# Altium PCB stm32f107rct7_devbrd_old.PcbDoc
Units mm, origin at the board's own origin, x right, y up, seen from the top; angles counter-clockwise.
Board outline 80 x 40 mm, 2 copper layers (Top Layer, Bottom Layer); 37 components, 65 nets, 219 pads, 32 vias.
Unrouted connection lines stored in the file: 14.
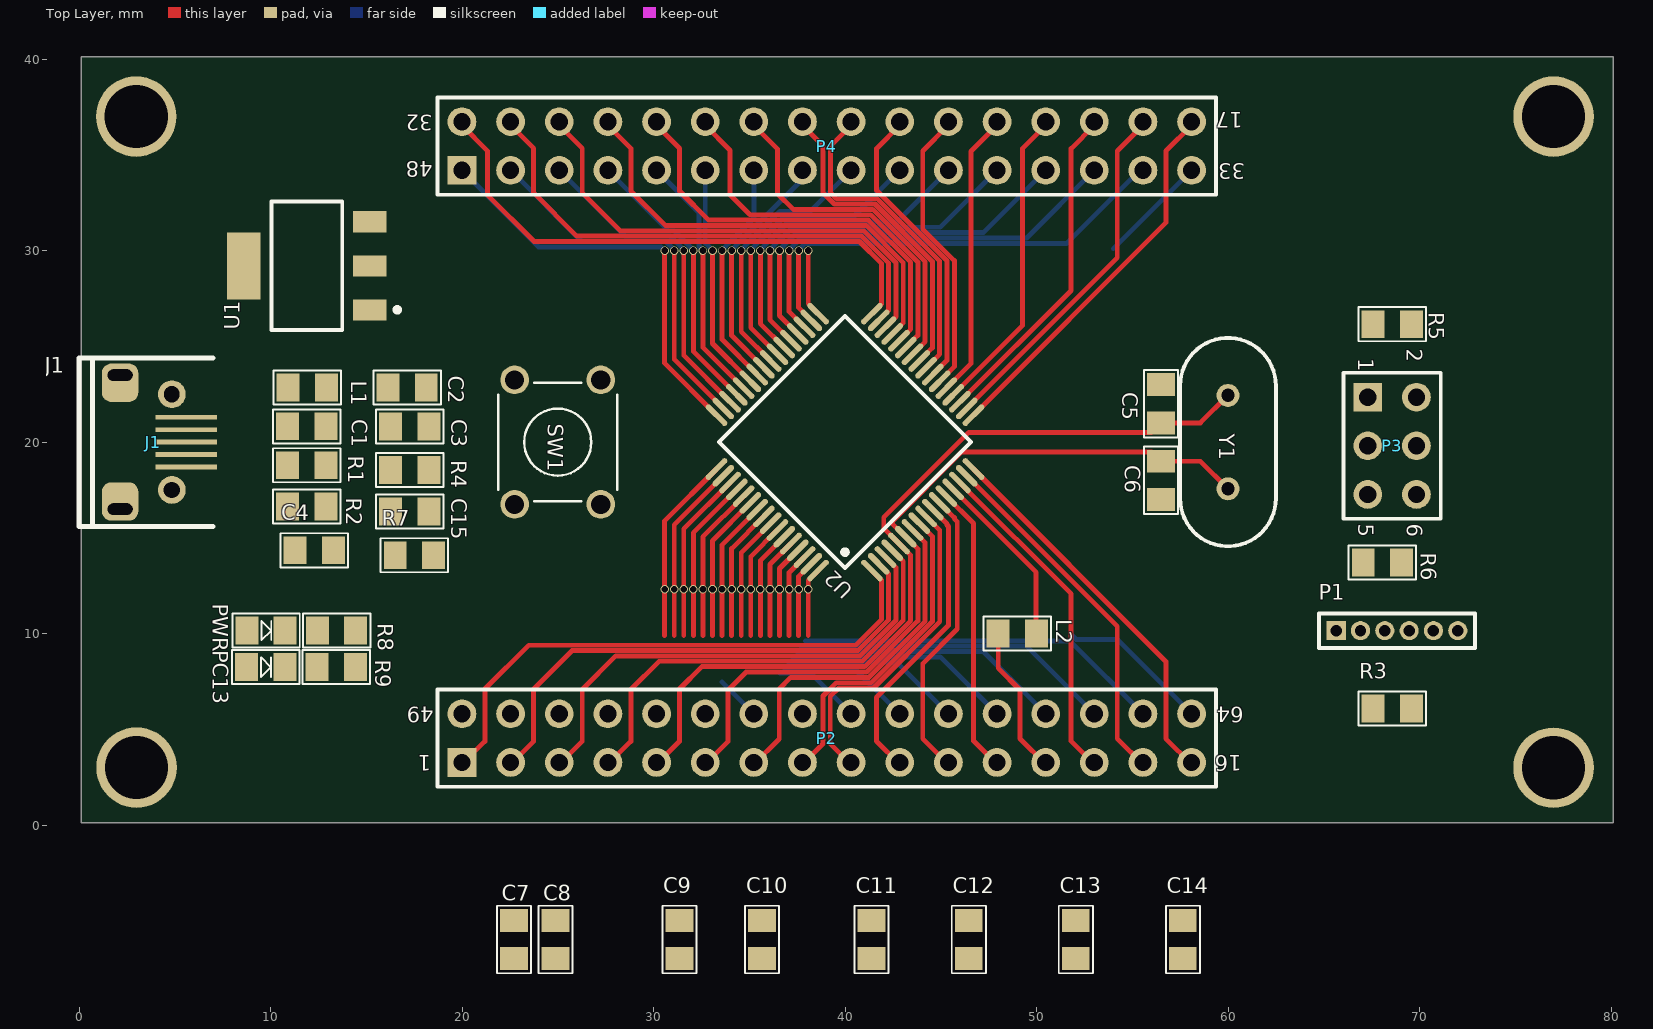
[diagram p0: Top Layer view]
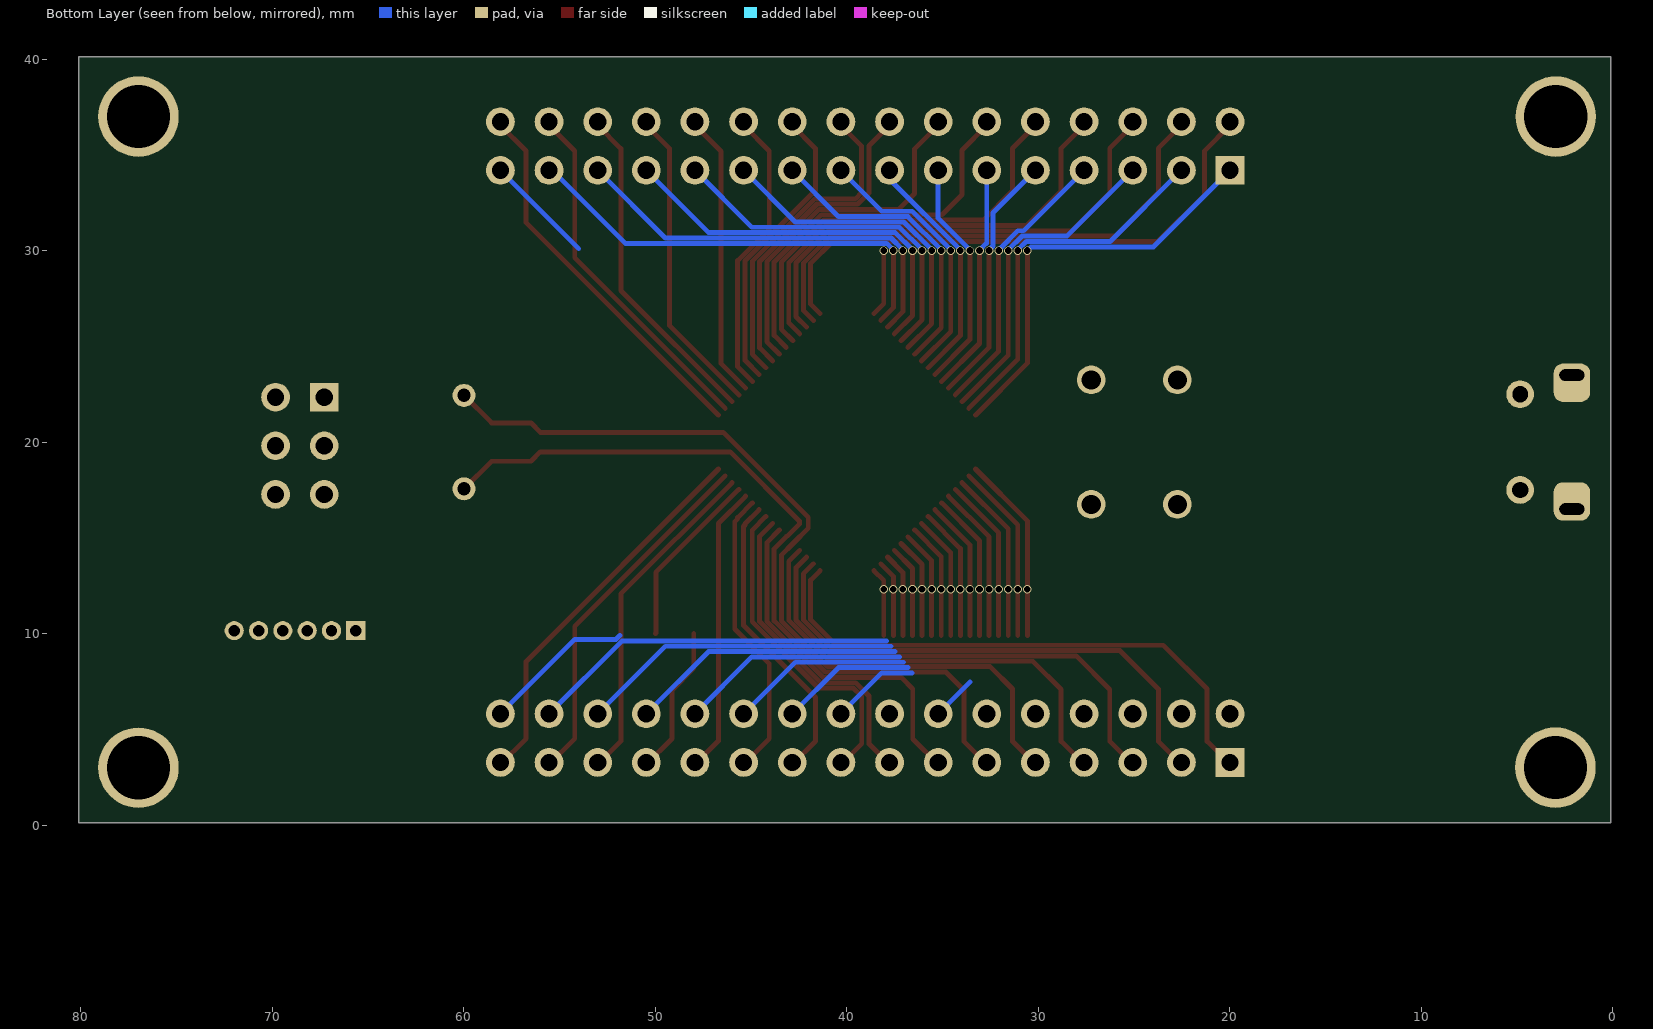
[diagram p1: Bottom Layer view, seen from below]

## Layer stack, top to bottom
Top Solder: solder mask 0.0102, Solder Resist, Dk 3.5
Top Layer: signal copper 0.0356
Dielectric 1: dielectric 0.32, FR-4, Dk 4.8
Bottom Layer: signal copper 0.0356
Bottom Solder: solder mask 0.0102, Solder Resist, Dk 3.5

## Board outline
0.11,0.118 80.11,0.118 80.11,40.118 0.11,40.118

## Design rules (kind name [scope] priority, off if disabled: settings)
Clearance [All] p1: gap=0.203 ignorepadtopadclearanceinfootprint=TRUE
HoleSize [All] p1: absolutevalues=TRUE maxlimit=5.08 minlimit=0.254 maxpercent=80.000 minpercent=20.000
MinimumSolderMaskSliver [All] p1: minsoldermaskwidth=0.025
PolygonConnect [All] p1: connectstyle=Relief reliefconductorwidth=0.254 reliefentries=4 polygonreliefangle="90 Angle" airgapwidth=0.254
RoutingVias [All] p1: holewidth=0.35 width=0.45 viastyle="Through Hole" minholewidth=0.35 minwidth=0.45 maxholewidth=1.016 maxwidth=1.27
SilkToSilkClearance [All] p1: silktosilkclearance=0.025
SilkToSolderMaskClearance [IsPad] p1: minsilkscreentomaskgap=0 clearancetoexposedcopper=TRUE
SolderMaskExpansion [All] p1: expansion=0.102
Width [All] p1: maxlimit=5.08 minlimit=0.254 preferedwidth=0.254
26 further rules are at their usual default settings.

## Classes and differential pairs
component class stm32f107rct7_devbrd: C7 C8 C9 C10 C11 C12 C13 C14

## Components (designator, comment, footprint, x,y, rotation, side; value= is the part's Value field where it differs from the comment)
C1 "10nF" SMD0805_CAP 11.889,20.819 r270 top
C2 "10nF" SMD0805_CAP 17.128,22.846 r270 top value=10uF
C3 "10nF" SMD0805_CAP 17.271,20.809 r270 top value=10uF
C4 "100nF" SMD0805_CAP 12.286,14.347 r90 top
C5 "22pF" SMD0805_CAP 56.493,21.996 r0 top
C6 "22pF" SMD0805_CAP 56.493,17.996 r180 top
C7 "100nF" SMD0805_CAP 22.709,-5.978 r0 top
C8 "4.7uF" SMD0805_CAP 24.875,-5.978 r0 top
C9 "100nF" SMD0805_CAP 31.345,-5.978 r0 top
C10 "4.7uF" SMD0805_CAP 35.663,-5.978 r0 top
C11 "100nF" SMD0805_CAP 41.378,-5.978 r0 top
C12 "4.7uF" SMD0805_CAP 46.458,-5.978 r0 top
C13 "100nF" SMD0805_CAP 52.046,-5.978 r0 top
C14 "4.7uF" SMD0805_CAP 57.634,-5.978 r0 top
C15 "100nF" SMD0805_CAP 17.271,16.374 r270 top
J1 "MicroUSB_B" micro_usb_molex_105017-0001 -0.007,19.996 r0 top
L1 "Bead" SMD0805 11.921,22.851 r270 top
L2 "Bead" SMD0805 48.993,9.996 r270 top value=10mH
P1 "ISP" ISP 64.742,9.251 r0 top
P2 "Header 16X2A" HDR2X16_CEN 19.993,3.266 r0 top
P3 "Header 3X2" HDR2X3 67.293,22.343 r270 top
P4 "Header 16X2A" HDR2X16_CEN 19.993,34.186 r0 top
PC13 "LED0" LED 9.746,8.246 r0 top (schematic designator PC1)
PWR "LED0" LED 9.762,10.156 r0 top (schematic designator PWR1)
R1 "22R" SMD0805 11.889,18.787 r270 top
R2 "22R" SMD0805 11.889,16.637 r270 top
R3 "22R" SMD0805 68.563,6.087 r270 top
R4 "1K" SMD0805 17.271,18.533 r90 top
R5 "100K" SMD0805 68.563,26.153 r270 top
R6 "100K" SMD0805 68.055,13.707 r90 top
R7 "100K" SMD0805 17.509,14.088 r270 top value=10k
R8 "1K" SMD0805 13.445,10.156 r90 top
R9 "1K" SMD0805 13.429,8.246 r90 top
SW1 "Switch" 430156050726 24.993,19.996 r90 top
U1 "NCP1117" SOT-223-2 11.889,29.201 r90 top
U2 "STM32F107RCT7" QFP50P1200X1200X160-64N 39.993,19.996 r135 top
Y1 "8MHz" XTAL 59.993,19.996 r270 top

## Footprints (in the part's own frame and the unit in brackets; to place one, negate y for a bottom-side part, rotate by r counter-clockwise, add the part's x,y. Pads: shape width x height; smd on the part's side, far side on the other; paste and mask are expansions set on the pad)
430156050726 [mm] "6*6mm vertical type, THT, height 5.0mm, white actuator, 260gf, Bulk"
  round 1.5 hole 1: 1(-3.25,2.25) 2(-3.25,-2.25) 3(3.25,2.25) 4(3.25,-2.25)
  silkscreen extent -3.1,-3.1 3.1,3.1, body extent -3.95,-3.1 3.95,3.1, height 5
HDR2X3 [mm] "Connector; Header; 3x2 Position"
  rect 1.5x1.5 hole 0.9: 1(0,0)
  round 1.5 hole 0.9: 2(0,2.54) 3(2.54,0) 4(2.54,2.54) 5(5.08,0) 6(5.08,2.54)
  silkscreen extent -1.27,-1.27 6.35,3.81
HDR2X16_CEN [mm] "Connector; Header; 16x2 Position"
  rect 1.5x1.5 hole 0.9: 1(0,0)
  round 1.5 hole 0.9: 2(2.54,0) 3(5.08,0) 4(7.62,0) 5(10.16,0) 6(12.7,0) 7(15.24,0) 8(17.78,0) 9(20.32,0) 10(22.86,0) 11(25.4,0) 12(27.94,0) 13(30.48,0) 14(33.02,0) 15(35.56,0) 16(38.1,0) 17(0,2.54) 18(2.54,2.54) 19(5.08,2.54) 20(7.62,2.54) 21(10.16,2.54) 22(12.7,2.54) 23(15.24,2.54) 24(17.78,2.54) 25(20.32,2.54) 26(22.86,2.54) 27(25.4,2.54) 28(27.94,2.54) 29(30.48,2.54) 30(33.02,2.54) 31(35.56,2.54) 32(38.1,2.54)
  silkscreen extent -1.27,-1.27 39.37,3.81
ISP [mm]
  rect 1x1 hole 0.6: 1(0.9,0.9)
  round 1 hole 0.6: 2(2.17,0.9) 3(3.44,0.9) 4(4.71,0.9) 5(5.98,0.9) 6(7.25,0.9)
  silkscreen extent 0,0 8.15,1.8
LED [mm]
  rect 1.2x1.45 smd: 1(-1,0) 2(1,0)
  silkscreen extent -1.76,-0.89 1.76,0.89, body extent -2.54,-0.63 1.01,0.62, height 1.1
micro_usb_molex_105017-0001 [mm]
  rect 3.2x0.25 smd: 1(5.6,1.3) 2(5.6,0.65) 3(5.6,0) 4(5.6,-0.65) 5(5.6,-1.3)
  rrect50% 1.9x2 hole 0.6 slot 1.3 at 0 deg copper offset 0,0.4: 5(2.15,-3.5)
  rrect50% 1.9x2 hole 0.6 slot 1.3 at 0 deg copper offset 0,-0.4: 5(2.15,3.5)
  round 1.45 hole 0.85: 5(4.85,-2.5)
  round 1.45 hole 0.85 slot 0.8 at 0 deg: 5(4.85,2.5)
  silkscreen extent 0,-4.4 7,4.4, body extent -0.45,-4.1 4.95,4.1, height 2.78
QFP50P1200X1200X160-64N [mm]
  oval 1.475x0.3 smd: 1(-5.738,3.75) 2(-5.738,3.25) 3(-5.738,2.75) 4(-5.738,2.25) 5(-5.738,1.75) 6(-5.738,1.25) 7(-5.738,0.75) 8(-5.738,0.25) 9(-5.738,-0.25) 10(-5.738,-0.75) 11(-5.738,-1.25) 12(-5.738,-1.75) 13(-5.738,-2.25) 14(-5.738,-2.75) 15(-5.738,-3.25) 16(-5.738,-3.75) 33(5.738,-3.75) 34(5.738,-3.25) 35(5.738,-2.75) 36(5.738,-2.25) 37(5.738,-1.75) 38(5.738,-1.25) 39(5.738,-0.75) 40(5.738,-0.25) 41(5.738,0.25) 42(5.738,0.75) 43(5.738,1.25) 44(5.738,1.75) 45(5.738,2.25) 46(5.738,2.75) 47(5.738,3.25) 48(5.738,3.75)
  oval 0.3x1.475 smd: 17(-3.75,-5.738) 18(-3.25,-5.738) 19(-2.75,-5.738) 20(-2.25,-5.738) 21(-1.75,-5.738) 22(-1.25,-5.738) 23(-0.75,-5.738) 24(-0.25,-5.738) 25(0.25,-5.738) 26(0.75,-5.738) 27(1.25,-5.738) 28(1.75,-5.738) 29(2.25,-5.738) 30(2.75,-5.738) 31(3.25,-5.738) 32(3.75,-5.738) 49(3.75,5.738) 50(3.25,5.738) 51(2.75,5.738) 52(2.25,5.738) 53(1.75,5.738) 54(1.25,5.738) 55(0.75,5.738) 56(0.25,5.738) 57(-0.25,5.738) 58(-0.75,5.738) 59(-1.25,5.738) 60(-1.75,5.738) 61(-2.25,5.738) 62(-2.75,5.738) 63(-3.25,5.738) 64(-3.75,5.738)
  silkscreen extent -4.65,-4.65 4.65,4.65, body extent -6,-6 6,6, height 1.6
SMD0805 [mm]
  rect 1.45x1.2 smd: 1(0,-1) 2(0,1)
  silkscreen extent -0.89,-1.76 0.89,1.76, body extent -0.62,-1 0.63,1, height 0.5
SMD0805_CAP [mm]
  rect 1.45x1.2 smd: 1(0,-1) 2(0,1)
  silkscreen extent -0.89,-1.76 0.89,1.76, body extent -0.61,-1 0.64,1, height 0.8
SOT-223-2 [mm] "SOT-223/SC-73; 4 Leads; Body 6.7 x 7.3 mm, inc. leads (LxW max)"
  rect 1.1x1.75 smd: 1(-2.3,-3.3) 2(0,-3.3) 3(2.3,-3.3)
  rect 3.5x1.75 smd: 4(0,3.3)
  silkscreen extent -3.35,-4.85 3.35,1.85, body extent -3.35,-3.7 3.35,3.5, height 1.85
XTAL [mm]
  round 1.2 hole 0.7: 1(-2.44,0) 2(2.44,0)
  silkscreen extent -5.44,-2.5 5.44,2.5

## Part data
C1 C2 C3 C5 C6 C7 C8 C9 C10 C11 C12 C13 C14 C15: library part "Cap Semi", "Capacitor (Semiconductor SIM Model)", LatestRevisionDate=29-May-2009, LatestRevisionNote="IPC-7351 Footprint Added.", PackageDescription="Chip Capacitor", PackageReference=C1206, Published=8-Jun-2000, Publisher="Altium Limited"
C4: library part Cap, "Capacitor (Semiconductor SIM Model)"
L1 L2: library part Inductor, "Inductor", Code_IEC=1005, Code_JEITA=0402, LatestRevisionDate=29-May-2009, LatestRevisionNote="IPC-7351 Footprint Added.", PackageDescription="Chip Inductor", PackageReference=0402-A, Published=8-Jun-2000, Publisher="Altium Limited"
P1: library part MHDR1X6, "Header, 6-Pin", LatestRevisionDate=17-Jul-2002, LatestRevisionNote="Re-released for DXP Platform.", Publisher="Altium Limited"
P2 P4: "Header, 16-Pin, Dual row", LatestRevisionDate=17-Jul-2002, LatestRevisionNote="Re-released for DXP Platform.", Publisher="Altium Limited"
P3: "Header, 3-Pin, Dual row", LatestRevisionDate=17-Jul-2002, LatestRevisionNote="Re-released for DXP Platform.", Publisher="Altium Limited"
PC13 PWR: "Typical INFRARED GaAs LED", LatestRevisionDate=08-Jul-2005, LatestRevisionNote="Mech Layer 1 removed.", PackageDescription="LED; 2 Leads", PackageReference=LED-0, Published=8-Jun-2000, Publisher="Altium Limited"
R1 R2 R3 R4 R5 R6 R8 R9: library part "Res Semi", "Semiconductor Resistor", LatestRevisionDate=17-Jul-2002, LatestRevisionNote="Re-released for DXP Platform.", PackageDescription="Axial Device, Thru-Hole; 2 Leads; 0.5 in Pin Spacing", PackageReference=AXIAL-0.5, Published=8-Jun-2000, Publisher="Altium Limited"
R7: library part Res, "Semiconductor Resistor"
SW1: library part 430156050726, "WS-TATV THT Tact Switch 6X6 mm", ComponentLink1Description="Manufacturer URL", ComponentLink1URL=http://www.we-online.com, ComponentLink2Description=Datasheet, ComponentLink2URL=http://katalog.we-online.de/em/datasheet/4301x6.pdf, NoPins=04, PackageReference=430156050726, PartNumber=430156050726
U1: "IC REG 5V 1A DPAC"
U2: "Integrated Circuit", Manufacturer_Name=STMicroelectronics, Mouser2 Part Number=511-STM32F107RCT7, Datasheet Link=https://componentsearchengine.com//STM32F107RCT7.pdf, Height=1.6mm, Manufacturer_Part_Number=STM32F107RCT7, Mouser2 Price/Stock=https://www.mouser.com/Search/Refine.aspx?Keyword=511-STM32F107RCT7
Y1: library part XTAL, "Crystal Oscillator 8MHz", LatestRevisionDate=17-Jul-2002, LatestRevisionNote="Re-released for DXP Platform.", PackageDescription="Crystal, Thru-Hole; 2 Leads; Body 3.1 x 8.2 mm (Dia.xH)", PackageReference=R38, Published=8-Jun-2000, Publisher="Altium Limited"

## Free pads (board coordinates)
  round 4.2 hole 3.3: ""(2.982,36.995) ""(3,3) ""(76.993,2.996) ""(76.993,36.996)

## Via types
v1: diameter 0.45, hole 0.35, Top Layer to Bottom Layer, tented both sides, 32 vias

## Nets (pads, with @x,y where several pads share a name; then routed paths per layer and width w, separated by ;. In a path a pad name is that pad's centre, name@x,y a point inside that pad or via, vN(x,y) a via of type N, cw(c..) or ccw(c..) an arc to the next point about the centre after c; other vN are vias at no path point)
BOOT0: 
BOOT1: 
GND: C7.1 C8.1 C9.1 C10.1 C11.1 C12.1 C13.1 C14.1
NetJ1_2: 
NetJ1_3: 
NetP1_4: 
NetP3_3: 
NetP3_4: 
NetPC1_2: 
NetPWR1_2: 
nRST: 
OSCIN: 
OSCOUT: 
PA0: 
PA1: 
PA2: 
PA3: 
PA4: 
PA5: 
PA6: 
PA7: 
PA8: 
PA9: 
PA10: 
PA11: 
PA12: 
PA13: 
PA14: 
PA15: 
PB0: 
PB1: 
PB3: 
PB4: 
PB5: 
PB6: 
PB7: 
PB8: 
PB9: 
PB10: 
PB11: 
PB12: 
PB13: 
PB14: 
PB15: 
PC0: 
PC1: 
PC2: 
PC3: 
PC4: 
PC5: 
PC6: 
PC7: 
PC8: 
PC9: 
PC10: 
PC11: 
PC12: 
PC13: 
PC14: 
PC15: 
PD2: 
VBUS: 
VCC3V3: C7.2 C8.2 C9.2 C10.2 C11.2 C12.2 C13.2 C14.2
VCC5V: 
VCCA: 
pads on no net: C1.1 C1.2 C2.1 C2.2 C3.1 C3.2 C4.1 C4.2 C5.1 C5.2 C6.1 C6.2 C15.1 C15.2 J1.1 J1.2 J1.3 J1.4 J1.5 L1.1 L1.2 L2.1 L2.2 P1.1 P1.2 P1.3 P1.4 P1.5 P1.6 P2.1 P2.2 P2.3 P2.4 P2.5 P2.6 P2.7 P2.8 P2.9 P2.10 P2.11 P2.12 P2.13 P2.14 P2.15 P2.16 P2.17 P2.18 P2.19 P2.20 P2.21 P2.22 P2.23 P2.24 P2.25 P2.26 P2.27 P2.28 P2.29 P2.30 P2.31 P2.32 P3.1 P3.2 P3.3 P3.4 P3.5 P3.6 P4.1 P4.2 P4.3 P4.4 P4.5 P4.6 P4.7 P4.8 P4.9 P4.10 P4.11 P4.12 P4.13 P4.14 P4.15 P4.16 P4.17 P4.18 P4.19 P4.20 P4.21 P4.22 P4.23 P4.24 P4.25 P4.26 P4.27 P4.28 P4.29 P4.30 P4.31 P4.32 PC13.1 PC13.2 PWR.1 PWR.2 R1.1 R1.2 R2.1 R2.2 R3.1 R3.2 R4.1 R4.2 R5.1 R5.2 R6.1 R6.2 R7.1 R7.2 R8.1 R8.2 R9.1 R9.2 SW1.1 SW1.2 SW1.3 SW1.4 U1.1 U1.2 U1.3 U1.4 U2.1 U2.2 U2.3 U2.4 U2.5 U2.6 U2.7 U2.8 U2.9 U2.10 U2.11 U2.12 U2.13 U2.14 U2.15 U2.16 U2.17 U2.18 U2.19 U2.20 U2.21 U2.22 U2.23 U2.24 U2.25 U2.26 U2.27 U2.28 U2.29 U2.30 U2.31 U2.32 U2.33 U2.34 U2.35 U2.36 U2.37 U2.38 U2.39 U2.40 U2.41 U2.42 U2.43 U2.44 U2.45 U2.46 U2.47 U2.48 U2.49 U2.50 U2.51 U2.52 U2.53 U2.54 U2.55 U2.56 U2.57 U2.58 U2.59 U2.60 U2.61 U2.62 U2.63 U2.64 Y1.1 Y1.2
copper on no net: | length 1147.3
  Top Layer w0.254: 19.993,3.166 21.192,4.365 21.192,7.103 23.478,9.389 40.554,9.389 41.893,10.728 41.893,12.793 41.399,13.287 ; 19.993,36.536 21.319,35.21 21.319,32.909 23.758,30.471 40.75,30.471 41.893,29.328 ; 22.533,3.166 23.732,4.365 23.732,7.103 25.739,9.109 40.67,9.109 42.274,10.714 42.274,13.119 41.753,13.64 ; 22.533,36.536 23.732,35.337 23.732,33.011 25.993,30.75 40.866,30.75 42.274,29.342 42.274,26.873 41.753,26.351 ; 25.073,3.166 26.272,4.365 26.272,7.077 28.025,8.83 40.786,8.83 42.655,10.699 42.655,13.445 42.106,13.994 ; 25.073,36.536 26.272,35.337 26.272,33.011 28.253,31.03 40.982,31.03 42.655,29.356 42.655,26.547 42.106,25.998 ; 27.613,3.166 28.812,4.365 28.812,7.077 30.285,8.551 40.902,8.551 43.036,10.685 43.036,13.771 42.46,14.347 ; 27.613,36.536 28.812,35.337 28.812,33.109 30.612,31.309 41.097,31.309 43.036,29.37 43.036,26.221 42.46,25.644 ; 30.153,3.166 31.352,4.365 31.352,7.103 32.521,8.271 41.017,8.271 43.417,10.671 43.417,14.097 42.813,14.701 42.02,15.494 42.02,16.065 46.462,20.506 56.003,20.506 56.493,20.996 58.553,20.996 59.993,22.436 ; 30.153,36.536 31.352,35.337 31.352,33.109 32.872,31.588 41.213,31.588 43.417,29.384 43.417,25.895 42.813,25.291 ; 30.575,9.897 30.575,9.996 30.575,15.881 33.284,18.59 ; v1(30.575,29.996) 30.575,24.111 33.284,21.402 ; 31.075,9.897 31.075,9.996 31.075,15.674 33.638,18.237 ; v1(31.075,29.996) 31.075,24.318 33.638,21.755 ; 31.575,9.897 31.575,9.996 31.575,15.467 33.991,17.883 ; v1(31.575,29.996) 31.575,24.525 33.991,22.109 ; 32.075,9.897 32.075,9.996 32.075,15.26 34.345,17.529 ; v1(32.075,29.996) 32.075,24.732 34.345,22.462 ; 32.575,9.897 32.575,9.996 32.575,15.053 34.698,17.176 ; v1(32.575,29.996) 32.575,24.939 34.698,22.816 ; 32.693,3.166 33.892,4.365 33.892,7.052 34.832,7.992 41.133,7.992 43.798,10.657 43.798,14.423 43.167,15.055 43.167,15.083 43.111,15.083 42.477,15.716 42.477,15.875 46.088,19.486 56.003,19.486 56.493,18.996 58.553,18.996 59.993,17.556 ; 32.693,36.536 33.991,35.238 33.991,32.912 35.035,31.868 41.329,31.868 43.798,29.399 43.798,25.569 43.167,24.937 ; 33.075,9.897 33.075,9.996 33.075,14.846 35.052,16.822 ; v1(33.075,29.996) 33.075,25.146 35.052,23.169 ; 33.575,9.897 33.575,9.996 33.575,14.639 35.406,16.469 ; v1(33.575,29.996) 33.575,25.353 35.406,23.523 ; 34.075,9.897 34.075,9.996 34.075,14.431 35.759,16.115 ; v1(34.075,29.996) 34.075,25.56 35.759,23.876 ; 34.575,9.897 34.575,9.996 34.575,14.224 36.113,15.762 ; v1(34.575,29.996) 34.575,25.767 36.113,24.23 ; 35.075,9.897 35.075,9.996 35.075,14.017 36.466,15.408 ; v1(35.075,29.996) 35.075,25.975 36.466,24.584 ; 35.233,3.166 36.559,4.492 36.559,7.103 37.169,7.712 41.249,7.712 44.179,10.643 44.179,14.749 43.52,15.408 ; 35.233,36.536 36.466,35.303 36.466,32.977 37.296,32.147 41.445,32.147 44.179,29.413 44.179,25.243 43.52,24.584 ; 35.575,9.897 35.575,9.996 35.575,13.81 36.82,15.055 ; v1(35.575,29.996) 35.575,26.182 36.82,24.937 ; 36.075,9.897 36.075,9.996 36.075,13.603 37.173,14.701 ; v1(36.075,29.996) 36.075,26.389 37.173,25.291 ; 36.575,9.897 36.575,9.996 36.575,13.396 37.527,14.347 ; v1(36.575,29.996) 36.575,26.596 37.527,25.644 ; 37.075,9.897 37.075,9.996 37.075,13.189 37.88,13.994 ; v1(37.075,29.996) 37.075,26.803 37.88,25.998 ; 37.575,9.897 37.575,9.996 37.575,12.982 38.234,13.64 ; v1(37.575,29.996) 37.575,27.01 38.234,26.351 ; 37.773,3.166 38.845,4.238 38.845,6.736 39.542,7.433 41.365,7.433 44.56,10.629 44.56,15.075 43.874,15.762 ; 37.773,36.536 38.845,35.464 38.845,33.011 39.429,32.427 41.56,32.427 44.56,29.427 44.56,24.916 43.874,24.23 ; 38.075,9.897 38.075,9.996 38.075,12.775 38.588,13.287 ; v1(38.075,29.996) 38.075,27.217 38.588,26.705 ; 40.313,3.166 39.226,4.253 39.226,6.722 39.658,7.154 41.48,7.154 44.941,10.615 44.941,15.401 44.227,16.115 ; 40.313,36.536 39.24,35.463 39.24,33.011 39.545,32.706 41.676,32.706 44.935,29.448 44.935,24.584 44.227,23.876 ; 41.399,26.705 41.893,27.199 41.893,29.255 ; 42.853,3.166 41.639,4.38 41.639,6.666 45.398,10.425 45.398,15.591 45.322,15.667 45.322,15.728 44.581,16.469 ; 42.853,36.536 41.639,35.322 41.639,33.138 45.322,29.455 45.322,24.264 44.581,23.523 ; 44.935,16.822 45.703,16.054 45.703,15.993 45.856,15.841 45.856,10.236 44.052,8.432 44.052,4.507 45.393,3.166 ; 44.935,23.169 45.703,23.938 45.703,29.469 44.052,31.12 44.052,35.195 45.393,36.536 ; 45.288,17.176 46.702,15.762 46.702,4.397 47.933,3.166 ; 45.288,22.816 46.569,24.097 46.569,35.172 47.933,36.536 ; 45.642,17.529 49.972,13.199 49.972,10.017 49.993,9.996 ; 45.642,22.462 49.259,26.08 49.259,35.322 50.473,36.536 ; 45.995,17.883 51.799,12.079 51.799,4.38 53.013,3.166 ; 45.995,22.109 51.799,27.913 51.799,35.322 53.013,36.536 ; 46.349,18.237 54.212,10.373 54.212,4.507 55.553,3.166 ; 46.349,21.755 54.212,29.619 54.212,35.195 55.553,36.536 ; 46.702,18.59 56.752,8.54 56.752,4.507 58.093,3.166 ; 46.702,21.402 56.752,31.452 56.752,35.195 58.093,36.536 ; 47.993,9.996 47.993,8.191 49.132,7.052 49.132,4.507 50.473,3.166
  Bottom Layer w0.254: 19.993,34.186 23.988,30.191 30.38,30.191 v1(30.575,29.996) ; 22.533,34.186 26.248,30.471 30.634,30.471 31.075,30.03 v1(31.075,29.996) ; 25.073,34.186 28.509,30.75 30.855,30.75 31.575,30.03 v1(31.575,29.996) ; 27.613,34.186 30.769,31.03 31.075,31.03 31.953,30.152 31.953,30.118 v1(32.075,29.996) ; 30.153,34.186 32.368,31.971 32.368,30.237 32.575,30.03 v1(32.575,29.996) ; 32.693,34.186 32.693,30.378 32.698,30.373 32.732,30.373 32.953,30.152 32.953,30.118 v1(33.075,29.996) ; 33.575,7.464 35.233,5.806 ; v1(33.575,29.996) 33.575,30.03 35.233,31.688 35.233,34.186 ; v1(34.075,29.996) 34.075,30.03 37.773,33.728 37.773,34.186 ; v1(34.575,29.996) 34.575,30.03 36.595,32.05 38.177,32.05 40.313,34.186 ; v1(35.075,29.996) 35.075,30.03 36.816,31.77 40.438,31.77 42.853,34.186 ; v1(35.575,29.996) 35.575,30.03 37.037,31.491 42.698,31.491 45.393,34.186 ; v1(36.075,29.996) 36.075,30.03 37.257,31.211 44.959,31.211 47.933,34.186 ; v1(36.575,29.996) 36.575,30.03 37.478,30.932 47.219,30.932 50.473,34.186 ; 36.595,7.942 38.177,7.942 40.313,5.806 ; 36.816,8.221 40.438,8.221 42.853,5.806 ; 37.037,8.501 42.698,8.501 45.393,5.806 ; v1(37.075,29.996) 37.075,30.03 37.698,30.653 49.48,30.653 53.013,34.186 ; 37.257,8.78 44.959,8.78 47.933,5.806 ; 37.478,9.06 47.219,9.06 50.473,5.806 ; v1(37.575,29.996) 37.575,30.03 37.919,30.373 51.575,30.373 55.387,34.186 55.553,34.186 ; 37.698,9.339 49.48,9.339 53.013,5.806 ; 37.773,5.806 37.773,6.298 ; 37.919,9.618 51.741,9.618 55.553,5.806 ; 51.856,9.898 52.058,9.696 54.203,9.696 58.093,5.806 ; 54.001,30.094 58.093,34.186
  other v1: 30.575,12.31 31.075,12.31 31.575,12.31 32.075,12.31 32.575,12.31 33.075,12.31 33.575,12.31 34.075,12.31 34.575,12.31 35.075,12.31 35.575,12.31 36.075,12.31 36.575,12.31 37.075,12.31 37.575,12.31 38.075,12.31

## Other copper
Top Layer:
  pour cut-out: 6.669,0 6.669,4.102 ccw(c4.129,4.102) 4.129,6.642 -0.006,6.642 -0.006,0
  pour cut-out: -0.018,33.32 4.084,33.32 ccw(c4.084,35.86) 6.624,35.86 6.624,39.995 -0.018,39.995
  pour cut-out: 73.318,39.996 73.318,35.894 ccw(c75.858,35.894) 75.858,33.354 79.993,33.354 79.993,39.996
  pour cut-out: 79.993,6.671 75.891,6.671 ccw(c75.891,4.131) 73.351,4.131 73.351,-0.004 79.993,-0.004
Bottom Layer:
  pour cut-out: 6.675,0 6.675,4.102 ccw(c4.135,4.102) 4.135,6.642 0,6.642 0,0
  pour cut-out: -0.018,33.32 4.084,33.32 ccw(c4.084,35.86) 6.624,35.86 6.624,39.995 -0.018,39.995
  pour cut-out: 73.318,39.996 73.318,35.894 ccw(c75.858,35.894) 75.858,33.354 79.993,33.354 79.993,39.996
  pour cut-out: 79.993,6.671 75.891,6.671 ccw(c75.891,4.131) 73.351,4.131 73.351,-0.004 79.993,-0.004

## Silkscreen, mask and mechanical layers (free items; w line width, h text height)
Mechanical 1:
  lines w0.254: -0.007,-0.004 -0.007,39.996 79.993,39.996 79.993,-0.004 -0.007,-0.004

## Text inside footprints (layer, text, board x,y; h text height)
P2: Top Overlay "49" at 18.525,6.187 h0.8 r180; Top Overlay "1" at 18.398,3.647 h0.8 r180; Top Overlay "64" at 60.816,6.182 h0.8 r180; Top Overlay "16" at 60.705,3.647 h0.8 r180
P3: Top Overlay "1" at 66.785,24.375 h0.8 r270; Top Overlay "2" at 69.325,24.883 h0.8 r270; Top Overlay "5" at 66.785,15.739 h0.8 r270; Top Overlay "6" at 69.325,15.739 h0.8 r270
P4: Top Overlay "32" at 18.469,37.093 h0.8 r180; Top Overlay "48" at 18.469,34.652 h0.8 r180; Top Overlay "33" at 60.887,34.553 h0.8 r180; Top Overlay "17" at 60.76,37.22 h0.8 r180